# EAGLE board untitled (EAGLE 7.2.0)
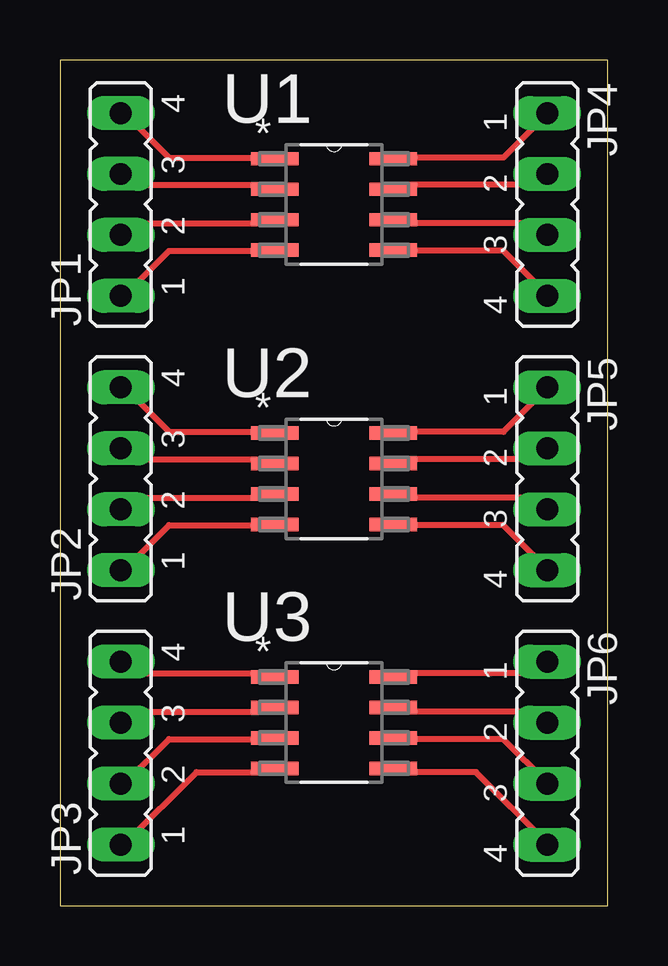
[diagram p0: board, top side]

Size 22.84 x 35.23 mm. Coordinates in mm from the lower left corner, seen from the top.
Outline: 0,0 22.84,0 22.84,35.23 0,35.23 0,0
Copper layers (1*16): Top 0.035mm / dielectric 1.5mm / Bottom 0.035mm
Design rules "default": minimum track width 10mil, minimum drill 24mil, track to track 8mil, track to pad 8mil, pad to pad 8mil, via to via 8mil, smd to smd 8mil, copper to edge 40mil, drill to drill 8mil, minimum pad ring 10mil, minimum via ring 8mil, stop-mask expansion 4mil, vias tented up to drill 0mil, thermal gap 10mil

## Footprints (pad centres in the part's own frame; a part is rotated, then mirrored left to right if it is on the bottom)
JP4 = drill 0.914 long: 1 -3.81,0; 2 -1.27,0; 3 1.27,0; 4 3.81,0
SOIC127P600X175-8N = smd 1.981 x 0.559: 1 -2.464,1.905; 2 -2.464,0.635; 3 -2.464,-0.635; 4 -2.464,-1.905; 5 2.464,-1.905; 6 2.464,-0.635; 7 2.464,0.635; 8 2.464,1.905

## Placement (x,y rotation side)
JP1  [JP4]  2.54,29.21 90 top
JP2  [JP4]  2.54,17.78 90 top
JP3  [JP4]  2.54,6.35 90 top
JP4  [JP4]  20.32,29.21 270 top
JP5  [JP4]  20.32,17.78 270 top
JP6  [JP4]  20.32,6.35 270 top
U1  OPA842ID  [SOIC127P600X175-8N]  11.43,29.21 0 top
U2  OPA842ID  [SOIC127P600X175-8N]  11.43,17.78 0 top
U3  OPA842ID  [SOIC127P600X175-8N]  11.43,7.62 0 top

## Library data of the parts
JP1-JP6 = jumper
U1-U3 = Texas Instruments_By_element14_Batch_1; MPN: OPA842ID; OC_FARNELL: 1212330; OC_NEWARK: 21H3994; PACKAGE: SOIC-8; SUPPLIER: Texas Instruments

## Nets
N$1: JP1.4 U1.1
N$2: JP1.3 U1.2
N$3: JP1.2 U1.3
N$4: JP1.1 U1.4
N$5: JP4.4 U1.5
N$6: JP4.3 U1.6
N$7: JP4.2 U1.7
N$8: JP4.1 U1.8
N$9: JP2.4 U2.1
N$10: JP2.3 U2.2
N$11: JP2.2 U2.3
N$12: JP2.1 U2.4
N$13: JP5.4 U2.5
N$14: JP5.3 U2.6
N$15: JP5.2 U2.7
N$16: JP5.1 U2.8
N$17: JP3.4 U3.1
N$18: JP3.3 U3.2
N$19: JP3.2 U3.3
N$20: JP3.1 U3.4
N$21: JP6.4 U3.5
N$22: JP6.2 U3.7
N$23: JP6.1 U3.8
N$24: JP6.3 U3.6

## Tracks (layer width: path | path; a pad name or v marks a point on that pad's centre or on a via)
N$1
  Top 0.254: U1.1 8.89,31.17 4.55,31.17 2.72,32.99 JP1.4
N$2
  Top 0.254: U1.2 8.89,30.02 3.18,30.02 2.72,30.48 JP1.3
N$3
  Top 0.254: U1.3 8.89,28.42 3.18,28.42 2.72,27.97 JP1.2
N$4
  Top 0.254: U1.4 8.89,27.28 4.55,27.28 2.72,25.45 JP1.1
N$5
  Top 0.254: U1.5 13.92,27.28 18.49,27.28 20.32,25.45 JP4.4
N$6
  Top 0.254: U1.6 13.92,28.42 19.86,28.42 20.32,27.97 JP4.3
N$7
  Top 0.254: JP4.2 19.86,30.02 13.92,30.02 U1.7
N$8
  Top 0.254: U1.8 13.92,31.17 18.49,31.17 20.32,32.99 JP4.1
N$9
  Top 0.254: U2.1 8.89,19.74 4.55,19.74 2.72,21.56 JP2.4
N$10
  Top 0.254: U2.2 8.89,18.59 3.18,18.59 2.72,19.05 JP2.3
N$11
  Top 0.254: U2.3 8.89,16.99 3.18,16.99 2.72,16.54 JP2.2
N$12
  Top 0.254: U2.4 8.89,15.85 4.55,15.85 2.72,14.02 JP2.1
N$13
  Top 0.254: U2.5 13.92,15.85 18.49,15.85 20.32,14.02 JP5.4
N$14
  Top 0.254: U2.6 13.92,16.99 19.86,16.99 20.32,16.54 JP5.3
N$15
  Top 0.254: JP5.2 19.86,18.59 13.92,18.59 U2.7
N$16
  Top 0.254: U2.8 13.92,19.74 18.49,19.74 20.32,21.56 JP5.1
N$17
  Top 0.254: U3.1 8.89,9.68 3.18,9.68 2.72,10.14 JP3.4
N$18
  Top 0.254: U3.2 8.89,8.08 3.18,8.08 2.72,7.62 JP3.3
N$19
  Top 0.254: U3.3 8.89,6.93 4.55,6.93 2.72,5.11 JP3.2
N$20
  Top 0.254: U3.4 8.89,5.56 5.69,5.56 2.72,2.59 JP3.1
N$21
  Top 0.254: U3.5 13.92,5.56 17.35,5.56 20.32,2.59 JP6.4
N$22
  Top 0.254: JP6.2 19.86,8.08 13.92,8.08 U3.7
N$23
  Top 0.254: U3.8 13.92,9.68 19.86,9.68 20.32,10.14 JP6.1
N$24
  Top 0.254: U3.6 13.92,6.93 18.49,6.93 20.32,5.11 JP6.3